# Altium PCB Flyback_PCB.PcbDoc (part 2 of 2)
Units mm, origin at the board's own origin, x right, y up, seen from the top; angles counter-clockwise.
Board outline 91.5 x 62.4 mm, 2 copper layers (Top Layer, Bottom Layer), stack 1.671 mm thick; 42 components, 27 nets, 120 pads, 53 vias.
Unrouted connection lines stored in the file: 12.
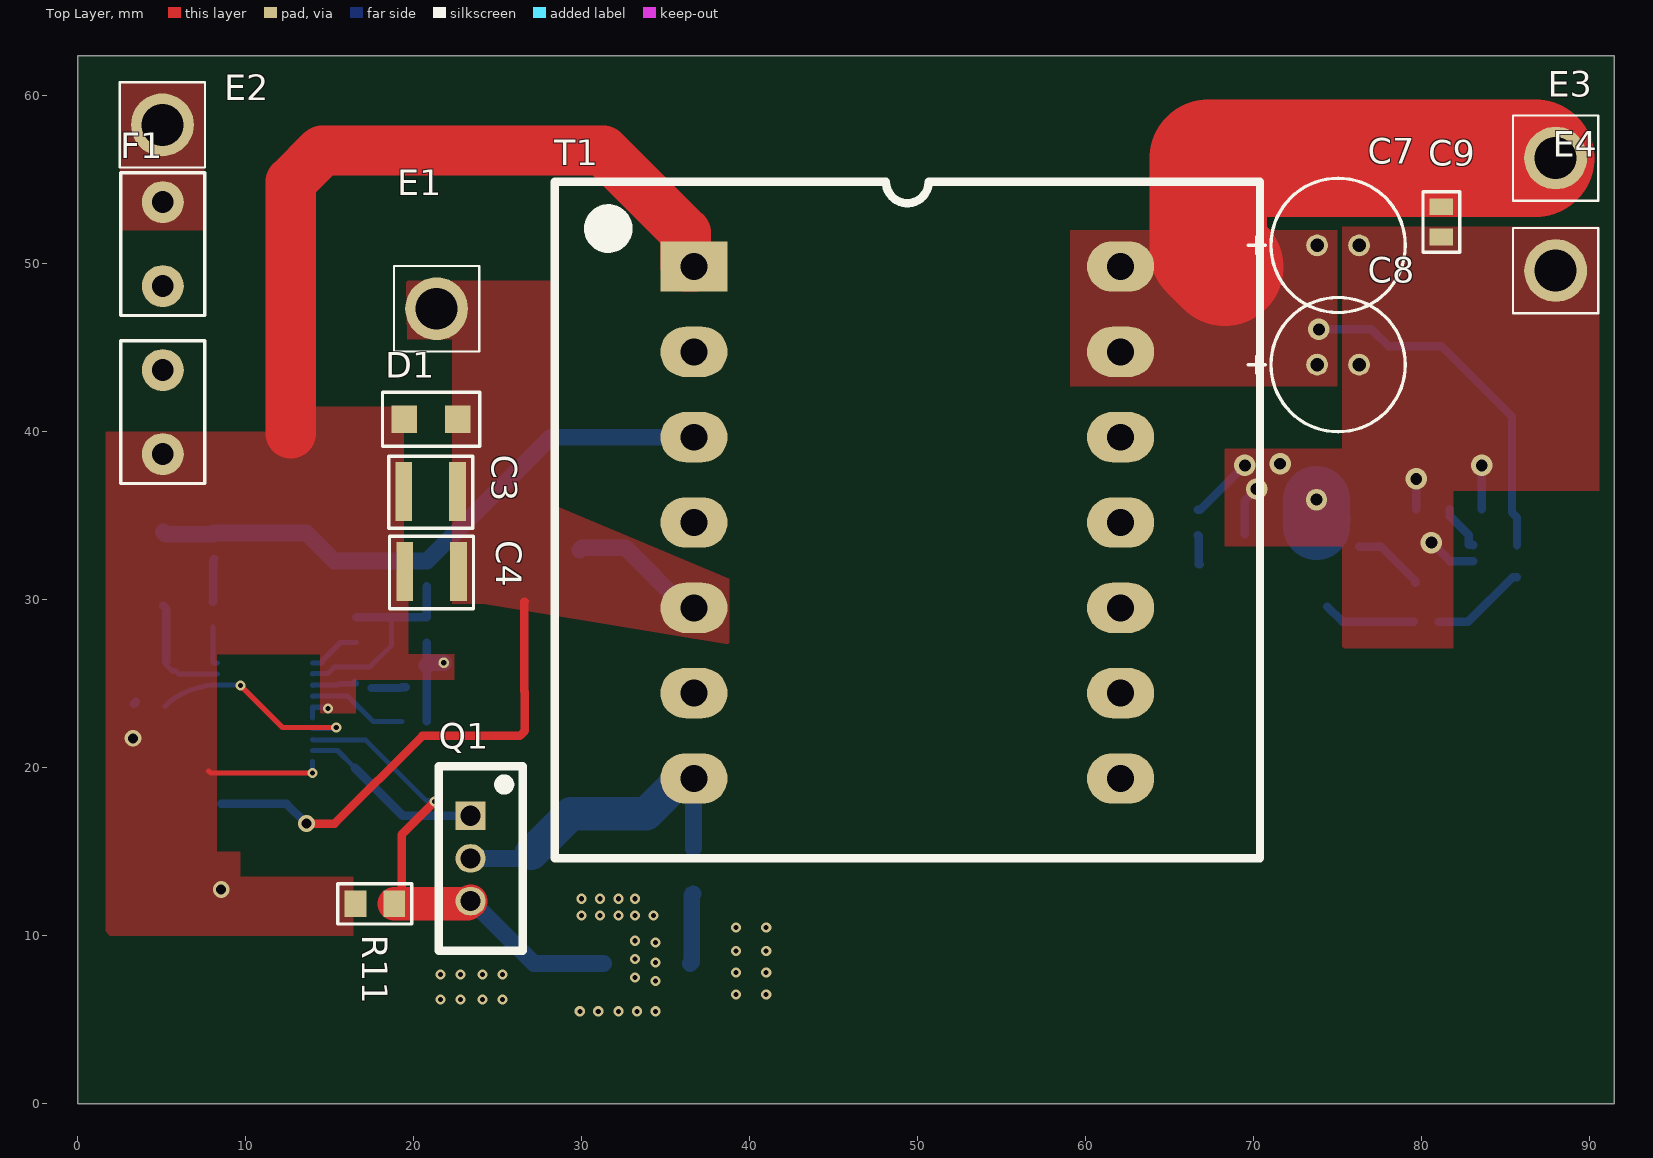
[diagram p0: Top Layer view]

## Part data (continued)
R5: library part R_Tc, "RES SMD 110K OHM 5% 1/10W 0603 / CRCW0603110KJNEA", Case Code (Imperial)=0603, Case Code (Metric)=1608, Manufacturer="Vishay Dale", Manufacturer Part Number=CRCW0603110KJNEA, Max Operating Temperature=155°C, Max Power Dissipation=100mW, Min Operating Temperature=-55°C, Package Quantity=1, Resistance=110kR, Resistor Type="Thick Film", Supplier Part Number 1=541-110KGCT-ND, Temperature Coefficient=200ppm/°C, Tolerance=5%, Voltage Rating=75V, Case/Package=0603, Category=Resistors, ComponentLink1Description=https://datasheet.ciiva.com/3256/dcrcwe3-3256965.pdf?src-supplier=Avnet, ComponentLink1URL=https://datasheet.ciiva.com/3256/dcrcwe3-3256965.pdf?src-supplier=Avnet, ComponentLink2Description=https://datasheet.ciiva.com/5549/dcrcwe3-109170-5549509.pdf?src-supplier=Mouser, ComponentLink2URL=https://datasheet.ciiva.com/5549/dcrcwe3-109170-5549509.pdf?src-supplier=Mouser, ComponentLink3Description=https://datasheet.ciiva.com/2493/dcrcwe3-2493661.pdf?src-supplier=Digi-Key, ComponentLink3URL=https://datasheet.ciiva.com/2493/dcrcwe3-2493661.pdf?src-supplier=Digi-Key, ComponentLink4Description=https://datasheet.ciiva.com/2493/dcrcwe3-2493662.pdf?src-supplier=Digi-Key, ComponentLink4URL=https://datasheet.ciiva.com/2493/dcrcwe3-2493662.pdf?src-supplier=Digi-Key, ComponentLink5Description=https://datasheet.ciiva.com/2493/dcrcwe3-2493663.pdf?src-supplier=Digi-Key, ComponentLink5URL=https://datasheet.ciiva.com/2493/dcrcwe3-2493663.pdf?src-supplier=Digi-Key, Construction=Rectangular, Contact Plating=Tin, Depth=0.85mm, Features="Automotive AEC-Q200", Height=0.02inch, Lead Free="Lead Free", Length=1.55mm, Military Standard=Not, Number of Terminations=2, Packaging="Tape and Reel", Power Rating=100mW, Pricing 1="1=0,10000, 10=0,03200, 100=0,01310, 1000=0,00588, 2500=0,00510 (USD)", Radiation Hardening=No, RoHS=Yes, RoHS Compliant=Yes, Series=CRCW, Stock 1=16475, Supplier 1=Digi-Key, Termination=SMD/SMT, Voltage Rating (DC)=75V, Weight=7.1E-05oz, Width=0.85mm
R6: library part R_FB2, "VISHAY         CRCW06035K36FKEA.             SMD Chip Resistor, Thick Film, 5.36 kohm, 75 V, 0603 [1608 Metric], 100 mW,  1%, CRCW Series", Case Code (Imperial)=0603, Case Code (Metric)=1608, Manufacturer=Vishay, Manufacturer Part Number=CRCW06035K36FKEA, Max Operating Temperature=155°C, Max Power Dissipation=100mW, Min Operating Temperature=-55°C, Package Quantity=5000, Resistance=5.36kR, Resistance Tolerance=1%, Resistor Type="Thick Film", Supplier Part Number 1=541-5.36KHCT-ND, Temperature Coefficient=100ppm/°C, Voltage Rating=75V, Case/Package=0603, Category=Resistors, ComponentLink1Description=https://datasheet.ciiva.com/3257/dcrcwe3-3257765.pdf?src-supplier=Avnet, ComponentLink1URL=https://datasheet.ciiva.com/3257/dcrcwe3-3257765.pdf?src-supplier=Avnet, ComponentLink2Description=https://datasheet.ciiva.com/7679/1697337-7679125.pdf?src-supplier=Element14, ComponentLink2URL=https://datasheet.ciiva.com/7679/1697337-7679125.pdf?src-supplier=Element14, ComponentLink3Description=https://datasheet.ciiva.com/7679/1697337-7679126.pdf?src-supplier=Element14, ComponentLink3URL=https://datasheet.ciiva.com/7679/1697337-7679126.pdf?src-supplier=Element14, ComponentLink4Description=https://datasheet.ciiva.com/16789/70201119-16789112.pdf?src-supplier=Allied+Electronics, ComponentLink4URL=https://datasheet.ciiva.com/16789/70201119-16789112.pdf?src-supplier=Allied+Electronics, ComponentLink5Description=https://datasheet.ciiva.com/7792/125364-7792346.pdf?src-supplier=Element14, ComponentLink5URL=https://datasheet.ciiva.com/7792/125364-7792346.pdf?src-supplier=Element14, ComponentLink6Description=https://datasheet.ciiva.com/22707/1697337-22707754.pdf?src-supplier=Element14, ComponentLink6URL=https://datasheet.ciiva.com/22707/1697337-22707754.pdf?src-supplier=Element14, ComponentLink7Description=https://datasheet.ciiva.com/5541/dcrcwe3-109170-5541375.pdf?src-supplier=Mouser, ComponentLink7URL=https://datasheet.ciiva.com/5541/dcrcwe3-109170-5541375.pdf?src-supplier=Mouser, Construction=Rectangular, Contact Plating=Tin, Depth=0.85mm, Features="Automotive AEC-Q200", Height=0.45mm, Lead Free="Lead Free", Length=1.55mm, Military Standard=Not, Number of Pins=2, Number of Terminations=2, Packaging="Tape and Reel", Power Rating=100mW, Pricing 1="1=0,10000, 10=0,03600, 100=0,01450, 1000=0,00652, 2500=0,00566 (USD)", Radiation Hardening=No, REACH SVHC="No SVHC", RoHS=Yes, RoHS Compliant=Yes, Series=CRCW, Size Code=0603, Stock 1=42, Supplier 1=Digi-Key, Technology="THICK FILM", Termination=SMD/SMT, Tolerance=1%, Voltage Rating (DC)=75V, Weight=7.1E-05oz, Width=0.85mm
R7: library part R_Gate2, "RES SMD 4.7 OHM 5% 1/10W 0603", Case Code (Imperial)=0603, Case Code (Metric)=1608, Manufacturer="Stackpole Electronics", Manufacturer Part Number=RMCF0603JT4R70, Max Operating Temperature=155°C, Max Power Dissipation=100mW, Min Operating Temperature=-55°C, Resistance=4.7R, Resistor Type="Thick Film", Supplier Part Number 1=RMCF0603JT4R70CT-ND, Temperature Coefficient=200ppm/°C, Tolerance=5%, Case/Package=0603, Category="Chip SMD Resistors", ComponentLink1Description=http://components.arrow.com/part/dataview/50500623S9982757N1174?src-supplier=Arrow+Electronics, ComponentLink1URL=http://components.arrow.com/part/dataview/50500623S9982757N1174?src-supplier=Arrow+Electronics, ComponentLink2Description=https://www.seielect.com/catalog/SEI-RMCF_RMCP.pdf?src-supplier=Avnet, ComponentLink2URL=https://www.seielect.com/catalog/SEI-RMCF_RMCP.pdf?src-supplier=Avnet, ComponentLink3Description=https://www.seielect.com/Catalog/SEI-RMCF_RMCP.pdf?src-supplier=Digi-Key, ComponentLink3URL=https://www.seielect.com/Catalog/SEI-RMCF_RMCP.pdf?src-supplier=Digi-Key, ComponentLink4Description=http://www.seielect.com/Catalog/SEI-RMC.pdf?src-supplier=Future+Electronics, ComponentLink4URL=http://www.seielect.com/Catalog/SEI-RMC.pdf?src-supplier=Future+Electronics, ComponentLink5Description=https://www.seielect.com/catalog/SEI-Packaging.pdf?src-supplier=Digi-Key, ComponentLink5URL=https://www.seielect.com/catalog/SEI-Packaging.pdf?src-supplier=Digi-Key, Contact Plating=Tin,Matte, Features="Automotive AEC-Q200", Height=0.022inch, Lead Free="Lead Free", Length=0.061inch, Mount="Surface Mount", Number of Terminations=2, Packaging="Tape and Reel", Power Rating=100mW, Pricing 1="1=0,10000, 10=0,02200, 100=0,00880, 1000=0,00396, 2500=0,00344 (USD)", Radiation Hardening=No, RoHS=Yes, RoHS Compliant=Yes, Series=RMCF, Size Code=0603, Stock 1=483, Supplier 1=Digi-Key, Width=0.031inch
R8: library part R_Drain2, "RES SMD 2.32K OHM 1% 1/10W 0603", Case Code (Imperial)=0603, Case Code (Metric)=1608, Manufacturer="Stackpole Electronics", Manufacturer Part Number=RMCF0603FT2K32, Max Operating Temperature=155°C, Max Power Dissipation=100mW, Min Operating Temperature=-55°C, Resistance=2.32kR, Resistor Type="Thick Film", Supplier Part Number 1=RMCF0603FT2K32CT-ND, Temperature Coefficient=100ppm/°C, Tolerance=1%, Case/Package=0603, Category="Chip SMD Resistors", ComponentLink1Description=https://www.seielect.com/Catalog/SEI-RMCF_RMCP.pdf?src-supplier=Digi-Key, ComponentLink1URL=https://www.seielect.com/Catalog/SEI-RMCF_RMCP.pdf?src-supplier=Digi-Key, ComponentLink2Description=https://www.seielect.com/catalog/SEI-RMCF_RMCP.pdf?src-supplier=Avnet, ComponentLink2URL=https://www.seielect.com/catalog/SEI-RMCF_RMCP.pdf?src-supplier=Avnet, Contact Plating=Tin,Matte, Features="Automotive AEC-Q200", Height=0.022inch, Lead Free="Lead Free", Length=0.061inch, Mount="Surface Mount", Number of Terminations=2, Packaging="Tape and Reel", Pricing 1="1=0,10000, 10=0,01700, 100=0,00680, 1000=0,00305, 2500=0,00264 (USD)", Radiation Hardening=No, RoHS=Yes, RoHS Compliant=Yes, Series=RMCF, Stock 1=22121, Supplier 1=Digi-Key, Width=0.031inch
R9: library part R_Snubber_Pri, "Res Thick Film 2512 499 Ohm 1% 2W ±100ppm/°C Molded SMD SMD Paper T/R / CRM2512-FX-4990ELF", Case/Package=2512, Manufacturer=Bourns, Manufacturer Part Number=CRM2512-FX-4990ELF, Max Operating Temperature=155°C, Max Power Dissipation=2W, Min Operating Temperature=-55°C, Package Quantity=4000, Resistance=499R, Resistor Type="Thick Film", Supplier Part Number 1=118-CRM2512-FX-4990ELFCT-ND, Temperature Coefficient=100ppm/°C, Tolerance=1%, Category="Chip SMD Resistors", ComponentLink1Description=https://datasheet.ciiva.com/9119/crm-9119624.pdf?src-supplier=Avnet, ComponentLink1URL=https://datasheet.ciiva.com/9119/crm-9119624.pdf?src-supplier=Avnet, ComponentLink2Description=https://datasheet.ciiva.com/29521/crm-29521785.pdf?src-supplier=Digi-Key, ComponentLink2URL=https://datasheet.ciiva.com/29521/crm-29521785.pdf?src-supplier=Digi-Key, ComponentLink3Description=https://datasheet.ciiva.com/16929/crm-16929438.pdf?src-supplier=Avnet+Europe, ComponentLink3URL=https://datasheet.ciiva.com/16929/crm-16929438.pdf?src-supplier=Avnet+Europe, Height=0.031inch, Length=0.248inch, Number of Terminations=2, Packaging="Tape and Reel", Power Rating=2W, Pricing 1="1=0,63000, 10=0,44800, 100=0,23320, 1000=0,12558 (USD)", RoHS=Yes, Stock 1=10792, Supplier 1=Digi-Key, Width=0.122inch
R10: library part R_Snubber_Sec, "Vishay CRCW Series Thick Film Power Resistor 0603 Case 49.9 1% 0.25W 100ppm/K / CRCW060349R9FKEAHP", Case Code (Imperial)=0603, Case Code (Metric)=1608, Manufacturer="Vishay Dale", Manufacturer Part Number=CRCW060349R9FKEAHP, Max Operating Temperature=155°C, Max Power Dissipation=250mW, Min Operating Temperature=-55°C, Package Quantity=10, Resistance=49.9R, Resistor Type="Thick Film", Supplier Part Number 1=541-49.9SCT-ND, Temperature Coefficient=100ppm/°C, Tolerance=1%, Voltage Rating=75V, Case/Package=0603, Category="Chip SMD Resistors", ComponentLink1Description=https://datasheet.ciiva.com/9003/crcwhpe3-9003461.pdf?src-supplier=Avnet, ComponentLink1URL=https://datasheet.ciiva.com/9003/crcwhpe3-9003461.pdf?src-supplier=Avnet, ComponentLink2Description=https://datasheet.ciiva.com/2578/crcwhpe3-2578506.pdf?src-supplier=Digi-Key, ComponentLink2URL=https://datasheet.ciiva.com/2578/crcwhpe3-2578506.pdf?src-supplier=Digi-Key, ComponentLink3Description=https://datasheet.ciiva.com/2578/crcwhpe3-2578507.pdf?src-supplier=Digi-Key, ComponentLink3URL=https://datasheet.ciiva.com/2578/crcwhpe3-2578507.pdf?src-supplier=Digi-Key, ComponentLink4Description=https://datasheet.ciiva.com/2578/crcwhpe3-2578508.pdf?src-supplier=Digi-Key, ComponentLink4URL=https://datasheet.ciiva.com/2578/crcwhpe3-2578508.pdf?src-supplier=Digi-Key, ComponentLink5Description=https://datasheet.ciiva.com/48525/crcwhpe3-48525900.pdf?src-supplier=Avnet, ComponentLink5URL=https://datasheet.ciiva.com/48525/crcwhpe3-48525900.pdf?src-supplier=Avnet, ComponentLink6Description=https://datasheet.ciiva.com/5547/crcwhpe3-46056-5547183.pdf?src-supplier=Mouser, ComponentLink6URL=https://datasheet.ciiva.com/5547/crcwhpe3-46056-5547183.pdf?src-supplier=Mouser, Construction=Rectangular, Contact Plating=Tin, Depth=0.85mm, Features="Automotive AEC-Q200", Height=0.45mm, Lead Free="Lead Free", Length=1.6mm, Military Standard=Not, Mount="Surface Mount", Number of Terminations=2, Packaging="Tape and Reel", Power Rating=250mW, Pricing 1="1=0,17000, 10=0,14800, 100=0,05790, 1000=0,02422, 2500=0,02220 (USD)", Radiation Hardening=No, RoHS=Yes, RoHS Compliant=Yes, Series=CRCW-HP, Stock 1=174736, Supplier 1=Digi-Key, Technology="THICK FILM", Termination=SMD/SMT, Weight=7.1E-05oz, Width=0.033inch
R11: library part R_Sense, "TR / Current Sensors, 0805 0.25W, 5% / RL1220T-R020-J", Case Code (Imperial)=0805, Case Code (Metric)=2012, Manufacturer=Susumu, Manufacturer Part Number=RL1220T-R020-J, Max Operating Temperature=125°C, Max Power Dissipation=250mW, Min Operating Temperature=-55°C, Package Quantity=1, Resistance=20mR, Resistor Type="Thin Film", Supplier Part Number 1=RL12T.020JCT-ND, Temperature Coefficient=350ppm/°C, Tolerance=5%, Voltage Rating (DC)=100V, Case/Package=0805, Category=Resistors, ComponentLink1Description=https://datasheet.ciiva.com/2488/rl-data-sheet-2488002.pdf?src-supplier=Digi-Key, ComponentLink1URL=https://datasheet.ciiva.com/2488/rl-data-sheet-2488002.pdf?src-supplier=Digi-Key, ComponentLink2Description=https://datasheet.ciiva.com/2488/rl-data-sheet-2488003.pdf?src-supplier=Digi-Key, ComponentLink2URL=https://datasheet.ciiva.com/2488/rl-data-sheet-2488003.pdf?src-supplier=Digi-Key, ComponentLink3Description=https://datasheet.ciiva.com/2488/rl-data-sheet-2488004.pdf?src-supplier=Digi-Key, ComponentLink3URL=https://datasheet.ciiva.com/2488/rl-data-sheet-2488004.pdf?src-supplier=Digi-Key, ComponentLink4Description=https://datasheet.ciiva.com/12915/e-15-16-12915302.pdf?src-supplier=Mouser, ComponentLink4URL=https://datasheet.ciiva.com/12915/e-15-16-12915302.pdf?src-supplier=Mouser, Height=0.028inch, Lead Free="Lead Free", Length=0.079inch, Number of Terminations=2, Packaging="Tape and Reel", Power Rating=250mW, Pricing 1="1=0,35000, 10=0,30000, 25=0,21840, 50=0,15840, 100=0,11740, 250=0,09008, 500=0,07098, 1000=0,04914 (USD)", RoHS=Yes, RoHS Compliant=Yes, Series=RL, Stock 1=301682, Supplier 1=Digi-Key, Technology="THIN FILM", Termination=SMD/SMT, Weight=0.000194oz, Width=0.049inch
T1: library part Transformer_CoilFormer, "Epcos B66362W1014T001 ETD 34 Coil Former, 14 Pins / B66362W1014T001", Manufacturer="TDK EPCOS", Manufacturer Part Number=B66362W1014T001, Max Operating Temperature=180°C, Package Quantity=100, Supplier Part Number 1=495-5465-ND, Category="Coil Former", ComponentLink1Description=https://datasheet.ciiva.com/48906/70419804-48906870.pdf?src-supplier=Allied+Electronics, ComponentLink1URL=https://datasheet.ciiva.com/48906/70419804-48906870.pdf?src-supplier=Allied+Electronics, Inside Diameter=20.9mm, Material=Polyterephthalate, Number of Pins=14, Outside Diameter=25.4mm, Packaging=Bulk, Pricing 1="1=1,99000, 10=1,71200, 25=1,30080, 50=1,23240, 100=1,09550, 250=1,02704, 500=0,95858, 1000=0,91065 (USD)", RoHS=Yes, Supplier 1=Digi-Key, Termination=Pin, Weight=1.410958oz
U1: "DC/DC Cntrlr Single-OUT 142kHz Automotive 16-Pin TSSOP EP Tube", Manufacturer="Analog Devices / Linear Technology", Manufacturer Part Number=LT8316EFE#PBF, Supplier Part Number 1=LT8316EFE#PBF-ND, Pricing 1="1=5,81000, 10=5,22200, 25=4,93680, 100=4,27870, 250=4,05928, 500=3,64238, 1000=3,10500 (USD)", RoHS=Yes, Supplier 1=Digi-Key
U2: library part U_LT8309ES5#TRMPBF, "IC REG FLYBACK ISO ADJ TSOT23-5", Case/Package=SOT-23-5, Manufacturer="Analog Devices / Linear Technology", Manufacturer Part Number=LT8309ES5#TRMPBF, Max Operating Temperature=125°C, Max Supply Voltage=40V, Min Operating Temperature=-40°C, Min Supply Voltage=4.5V, Operating Supply Current=300uA, Supplier Part Number 1=LT8309ES5#TRMPBFCT-ND, Category="Voltage Regulators - Switching", ComponentLink1Description=https://datasheet.ciiva.com/29589/44473-29589472.pdf?src-supplier=Digi-Key, ComponentLink1URL=https://datasheet.ciiva.com/29589/44473-29589472.pdf?src-supplier=Digi-Key, ComponentLink2Description=https://datasheet.ciiva.com/29589/44473-29589470.pdf?src-supplier=Digi-Key, ComponentLink2URL=https://datasheet.ciiva.com/29589/44473-29589470.pdf?src-supplier=Digi-Key, ComponentLink3Description=https://datasheet.ciiva.com/29589/44473-29589471.pdf?src-supplier=Digi-Key, ComponentLink3URL=https://datasheet.ciiva.com/29589/44473-29589471.pdf?src-supplier=Digi-Key, Mount="Surface Mount", Number of Pins=5, Packaging="Cut Tape", Pricing 1="1=4,92000, 10=4,41500, 25=4,17360, 100=3,61720, 250=3,43176 (USD)", REACH SVHC="No SVHC", RoHS=Yes, Supplier 1=Digi-Key

## Via types
v1: diameter 0.6, hole 0.3, Top Layer to Bottom Layer, 42 vias
v2: diameter 1.27, hole 0.711, Top Layer to Bottom Layer, 8 vias
v3: diameter 1, hole 0.6, Top Layer to Bottom Layer, 3 vias

## Nets (pads, with @x,y where several pads share a name; then routed paths per layer and width w, separated by ;. In a path a pad name is that pad's centre, name@x,y a point inside that pad or via, vN(x,y) a via of type N, cw(c..) or ccw(c..) an arc to the next point about the centre after c; other vN are vias at no path point)
BIAS: C5.2 D2.1 U1.9 | length 6.9
  Bottom Layer w0.3: C5.2 5.275,26.125 5.625,25.775 5.825,25.775 6.025,25.575 U1.9
  Bottom Layer w0.5: D2.1 5.275,29.475 C5.2
DCM: R4.1 U1.10 | length 2.4
  Bottom Layer w0.3: R4.1 8.05,26.25 8.075,26.225 U1.10
Drain2: C12.1 D5.1 Q2.2 R8.1 T1.11 | length 5.6
  Bottom Layer w0.5: T1.11@62.1,24.44 T1.11@62.16,24.5 ; Q2.2@74.4,29.6 75.3,28.7 R8.1
FB: R3.1 R5.2 R6.2 U1.12 | length 13.1
  Bottom Layer w0.3: U1.12 14,25.6 14.694,25.6 14.703,25.61 14.888,25.61 15.278,26 17.4,26 18.7,27.3 18.7,28.95
  Bottom Layer w0.5: R5.2 18.7,28.95 R6.2 R3.1
GATE: Q1.1 U1.19 | length 11
  Bottom Layer w0.3: U1.19 15.475,21.025 16.5,20
  Bottom Layer w0.5: 16.5,20 19.36,17.14 Q1.1
INTVCC: C1.2 U1.8 U1.17 | length 13
  Top Layer w0.3: v1(9.7,24.9) 12.2,22.4 v1(15.4,22.4)
  Bottom Layer w0.3: C1.2 5.48,23.93 cw(c5.692,23.718) 5.514,23.959 cw(c8.474,20.001) 8.044,24.925 8.054,24.925 cw(c8.061,24.625) 8.061,24.925 U1.8 8.337,24.913 9.687,24.913 v1(9.7,24.9) ; U1.17 14,22.35 15.35,22.35 v1(15.4,22.4)
IREG//SS: R2.2 U1.14 | length 6
  Bottom Layer w0.3: U1.14@13.975,24.24 U1.14 16.072,24.275 17.597,22.75 R2.2
NetC2_1: C2.1 R1.2 | length 2.1
  Bottom Layer w0.5: C2.1@17.5,24.75 19.25,24.75 19.3,24.8 R1.2@19.55,24.8
NetC6_1: C6.1 R4.2 | length 2.6
  Bottom Layer w0.5: R4.2 8.088,29.913 8.088,32.387 C6.1
NetC6_2: C6.2 D2.2 R3.2 T1.1 | length 35.4
  Bottom Layer w1: D2.2 5.25,33.9 8.05,33.9 C6.2 13.625,33.975 15.3,32.3 R3.2 28.18,39.68 T1.1
NetC10_1: C10.1 R9.2 | length 4.2
  Bottom Layer w1: R9.2 36.562,8.438 36.562,12.413 C10.1
NetC10_2: C10.2 D6.2 Q1.2 T1.7 | length 19.5
  Bottom Layer w1: Q1.2 26.7,14.6 27,14.9 ; C10.2 36.675,15.225 36.675,19.335 T1.7
  Bottom Layer w2: 27,14.9 29.35,17.25 D6.2 33.85,17.25 35.96,19.36 T1.7
NetC12_2: C12.2 R10.1 | length 1.8
  Bottom Layer w0.5: R10.1 66.75,33.8 66.75,32.1 C12.2
NetC13_2: C13.2 U2.3 | length 2.9
  Bottom Layer w0.5: C13.2 81.7,34.975 82.825,33.85 82.825,33.275 83.075,33.275 U2.3
NetD3_1: D3.1 D4.2
NetD4_1: D4.1 D6.1
NetE2_1: E2.1 F1.1
NetR7_1: R7.1 U2.1
NetR8_2: R8.2 U2.5 | length 5.8
  Bottom Layer w0.5: R8.2@81.025,28.675 R8.2 82.8,28.7 85.45,31.35 U2.5
PGND: C1.1 C3.1 C4.1 C5.1 C14.1 C15.1 D1.2 F1.2 R1.1 R2.1 R6.1 R11.1 T1.3 U1.15 U1.16 U1.20 | length 58.4
  Top Layer w0.3: 7.8,19.8 7.925,19.675 v1(13.975,19.675)
  Top Layer w3: 12.7,39.9 12.7,54.893 14.557,56.75 31.3,56.75 36.2,51.85 36.2,49.84 T1.3
  Bottom Layer w0.3: v1(13.975,19.675) U1.20 ; U1.16 U1.15 14,23.6 14.837,23.6 v1(14.902,23.535)
  Bottom Layer w0.5: v3(3.3,21.75) v3@3.35,21.8 ; C1.1@3.35,23.8 C1.1@3.475,23.925 ; R2.1 R1.1 20.8,26.1 R6.1
  Bottom Layer w1: 20.8,26.1 20.95,26.25 v1(21.8,26.25)
  other v3: 8.55,12.75
S_GATE: Q2.1 R7.2 | length 4.3
  Bottom Layer w0.5: Q2.1 77.614,33.161 79.65,31.125 R7.2
SENSE: Q1.3 R9.1 R11.2 U1.18 | length 30
  Top Layer w0.5: R11.2 18.85,12.05 19.25,12.45 19.25,12.693 19.3,12.743 19.3,16.017 v1(21.263,17.98)
  Top Layer w2: R11.2 19.8,11.9 23.24,11.9 Q1.3
  Bottom Layer w0.3: U1.18 14.01,21.64 14.888,21.64 17.16,21.64 20.763,18.037 21.206,18.037 v1(21.263,17.98)
  Bottom Layer w1: Q1.3 23.45,12.06 27.16,8.35 R9.1
SGND: C7.2 C8.2 C9.1 C11.1 C13.1 C14.2 D5.2 E4.1 Q2.3 R10.2 U2.2 | length 17.1
  Bottom Layer w0.5: R10.2 66.825,35.35 69.475,38 v2(69.5,38) ; D5.2 69.5,35.9 v2(70.2,36.6) ; C13.1 v2(79.7,37.2) ; v2(80.6,33.4) 81.7,32.3 U2.2 ; C11.1 v2(83.6,38)
  Bottom Layer w4: 73.765,34.361 v2(73.765,35.965) 73.765,34.783 ; 73.765,34.765 73.782,34.783
  other v2: 71.6,38.1
TC: R5.1 U1.11 | length 3.2
  Bottom Layer w0.3: U1.11 14.53,26.225 14.556,26.25 14.556,26.356 15.65,27.45 R5.1
VC: C2.2 U1.13 | length 2.9
  Bottom Layer w0.3: U1.13@14,24.9 U1.13 15.478,24.925 15.553,25 16.5,25 C2.2 16.6,25.05 C2.2@16.5,25.15
VIN: C3.2 C4.2 C15.2 D1.1 D3.2 E1.1 T1.5 U1.1 U1.2 U1.3 | length 37.8
  Top Layer w0.5: v3(13.625,16.675) 15.3,16.675 20.525,21.9 26.332,21.9 26.625,22.193 26.625,24.525 26.6,24.55 26.6,29.875 26.625,29.9 ; T1.5@35.778,29.52 T1.5
  Bottom Layer w0.5: C15.2 12.45,17.85 v3(13.625,16.675)
  Bottom Layer w1: D3.2 30.05,33.1 32.62,33.1 36.2,29.52 T1.5
Vout: C7.1 C8.1 C9.2 C11.2 E3.1 T1.14 U2.4 | length 47.8
  Top Layer w7: 68.3,49.8 67.325,50.775 67.325,56.3 68.3,56.3 81.2,56.3 E3.1@86.8,56.3
  Bottom Layer w0.5: v2(73.9,46.1) 77.05,46.1 78.05,45.1 81.2,45.1 85.4,40.9 C11.2 85.4,35.2 85.7,34.9 U2.4
pads on no net: T1.2 T1.4 T1.6 T1.8 T1.12 U1.EPAD
copper on no net:
  other v1: 29.9,5.5 31,5.5 32.2,5.5 33.3,5.5 34.4,5.5 21.6,6.2 22.8,6.2 24.1,6.2 25.3,6.2 39.2,6.5 41,6.5 34.4,7.3 33.2,7.5 21.6,7.7 22.8,7.7 24.1,7.7 25.3,7.7 39.2,7.8 41,7.8 34.4,8.4 33.2,8.6 39.2,9.1 41,9.1 34.4,9.6 33.2,9.7 39.2,10.5 41,10.5 30,11.2 31.1,11.2 32.2,11.2 33.2,11.2 34.3,11.2 30,12.2 31.1,12.2 32.2,12.2 33.2,12.2

## Polygon pours and split planes (outlines as drawn)
Vout on Top Layer "VOUT_L01_P010" (solid, pour order 10): 59.1,52 59.1,42.7 75,42.7 75,52
PGND on Top Layer "Top Layer-PGND" (solid, pour order 54): 1.675,10.25 1.925,10 16.425,10 16.425,13.5 9.675,13.5 9.675,15 8.3,15 8.3,26.75 14.45,26.75 14.45,25.25 14.45,23.275 14.475,23.25 16.55,23.25 16.55,25.25 18.925,25.25 22.425,25.25 22.425,26.75 19.675,26.75 19.675,30.25 19.425,30.25 19.425,41.5 13.925,41.5 13.925,40 1.675,40
VIN on Top Layer "Top Layer-VIN" (solid, pour order 27): 19.575,49 19.613,45.5 22.3,45.5 22.3,44.8 22.3,29.75 24.133,29.75 38.8,27.35 38.8,31.25 28.375,35.625 28.375,45.125 28.375,49
NetE2_1 on Top Layer "NETE2_1_L01_P009" (solid, pour order 9): 7.55,60.75 2.55,60.75 2.55,52 7.55,52
SGND on Top Layer "SGND_L01_P026" (solid, pour order 26): 75.3,39 68.3,39 68.3,33.2 75.3,33.2
SGND on Top Layer "SGND_L01_P012" (solid, pour order 12): 75.3,37.4 81.8,37.4 81.9,37.3 81.9,27.1 75.4,27.1 75.3,27.2
SGND on Top Layer "SGND_L01_P011" (solid, pour order 11): 75.3,52.2 90.6,52.2 90.6,36.5 75.3,36.5
PGND on Bottom Layer "PGND_L02_P070" (solid, pour order 70): 44.2,43.4 44.2,54.4 38.8,54.4 38.8,46.6 42,43.4
SGND on Bottom Layer "SGND_L02_P069" (solid, pour order 69): 55.212,39.4 69.2,39.4 66.104,42.496 63.225,42.496
SGND on Bottom Layer "SGND_L02_P068" (solid, pour order 68): 65.879,42.496 59.004,42.496 58.1,43.4 55.2,43.4 55.2,39.5
SGND on Bottom Layer "SGND_L02_P067" (solid, pour order 67): 75.3,39 75.3,36.9 70.8,36.9 70.8,39 69.2,39 65.6,42.6
PGND on Bottom Layer "Bottom Layer-PGND" (solid, pour order 65): 1.7,10 16.1,10 16.1,13.1 3.7,13.1 3.7,21.9 3.6,21.9 3.6,27.1 2.6,28.1 2.6,36.8 11.2,36.8 11.2,36.4 19.1,36.4 19.1,41.3 14.3,41.3 14.1,54.2 29.771,54.2 34.8,48.5 38.8,48.5 38.8,57.9 11.8,57.9 11.6,57.7 11.6,54.2 11.2,54.2 11.2,39.9 1.6,39.9 1.6,36.8 1.7,36.8
VIN on Bottom Layer "VIN_L02_P055" (solid, pour order 55): 8.95,21.025 7.725,21.025 7.725,18.025 7.8,18.1 9,18.1
Drain2 on Bottom Layer "DRAIN2_L02_P001" (solid, pour order 1): 77.1,31.9 77.1,22.372 59,22.372 59,31.9

## Text inside footprints (layer, text, board x,y; h text height)
U1: Bottom Overlay "*" at 7.754,20.151 h1.27 r180; Mechanical 13 "*" at 9.014,21.396 h1.27 r180